# Allegro board main2.brd
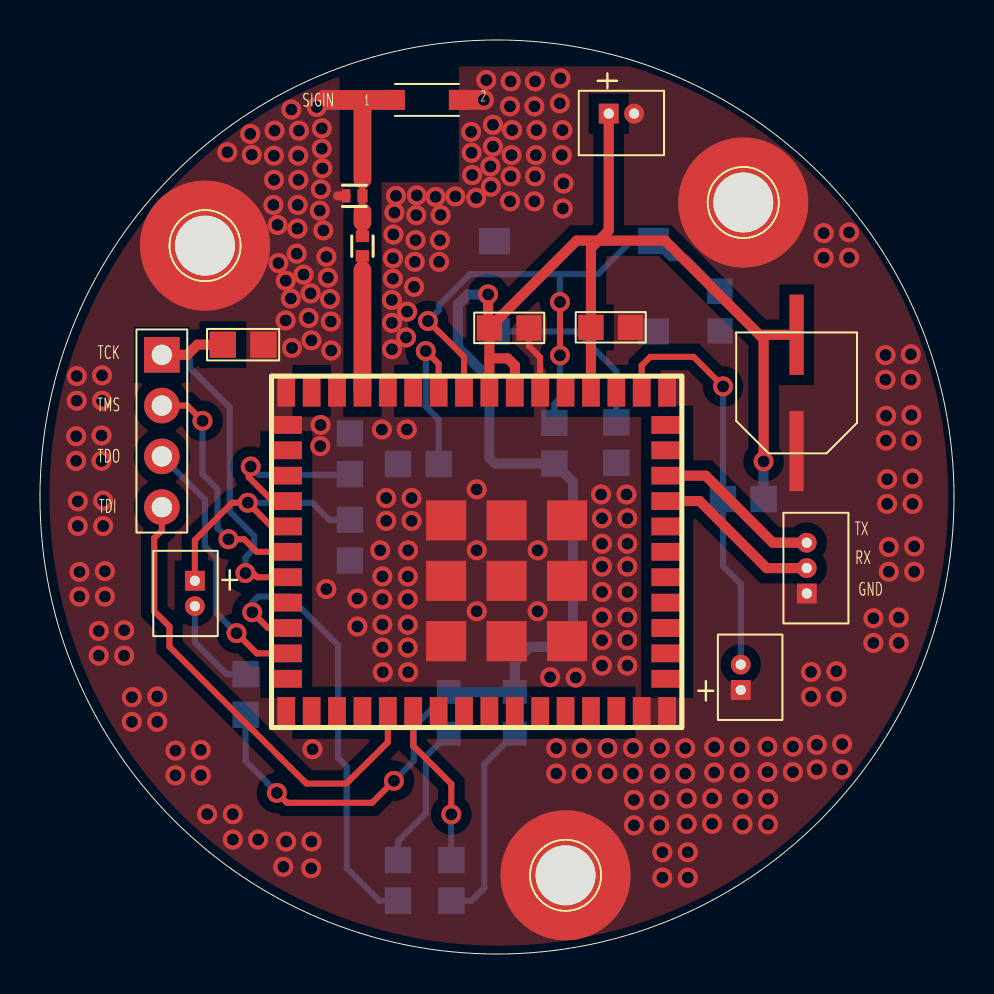
[diagram p0: board, top side]
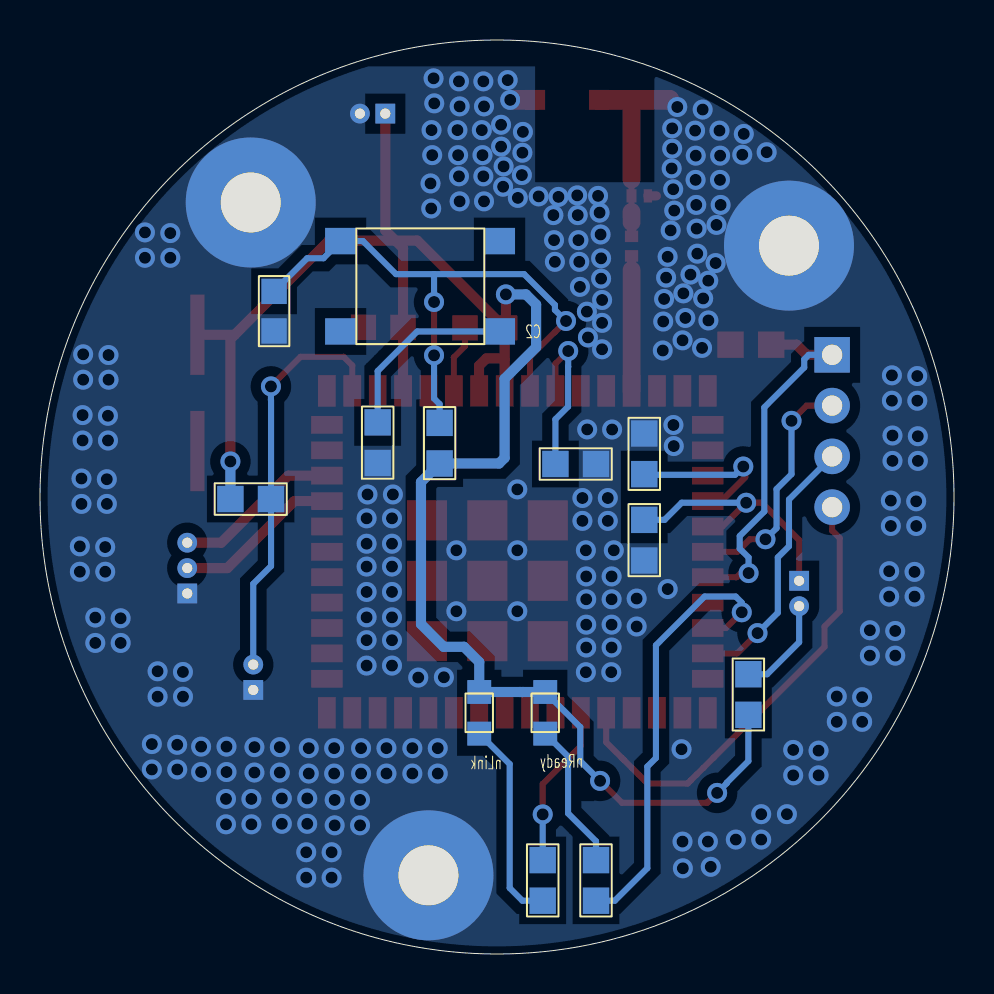
[diagram p1: board, bottom side, seen from below]

Outline 45.72 x 45.72 mm; copper layers: TOP, BOTTOM. Coordinates in mm from the lower left corner of the outline.
Outline path: circle c22.86,22.86 r22.86

## Placement (name value [footprint] x y rotation side)
C1  220uF/16V  [CAPPOL220U16V]  37.85 28.07 0 top
C2  22uF  [SMC0805]  23.47 31.32 0 top
C3  0.1uF  [SMC0805]  28.55 31.34 0 top
C4  1pF  [INDC_0402CS]  15.72 37.92 180 top
C5  0.1uF  [SMC0805]  34.01 32.16 270 bottom
D1  -  [LED]  23.75 12.06 270 bottom
D2  -  [LED]  20.45 12.06 270 bottom
J1  HEADER 2  [HEADER21P25MM]  35.05 13.84 180 top
J2  HEADER 3  [HEADER31P25MM]  38.35 19.3 180 top
J3  HEADER 4  [HEADER42P54MM]  6.1 26.16 0 top
J4  HEADER 2  [HEADER21P25MM]  7.75 18.03 0 top
J5  HEADER 2  [HEADER21P25MM]  29.08 42.04 90 top
J6  HEADER 1  [HOLD]  8.25 35.43 0 top
J7  HEADER 1  [HOLD]  26.29 3.94 0 top
J8  HEADER 1  [HOLD]  35.18 37.59 0 top
L1  3.6nH  [CC0402]  16.13 35.41 90 top
R1  75  [SMR0805]  20.57 3.68 270 bottom
R2  75  [SMR0805]  17.91 3.68 90 bottom
R3  4.7K  [SMR0805]  25.73 25.55 90 bottom
R4  100R  [SMR0805]  28.83 25.58 270 bottom
R5  4.7K  [SMR0805]  10.29 12.98 90 bottom
R6  4.7K  [SMR0805]  35.18 22.76 180 bottom
R7  100K  [SMR0805]  10.16 30.48 0 top
R8  2.7K  [SMR0805]  15.49 20.7 270 bottom
R9  100K  [SMR0805]  15.49 25.02 90 bottom
R10  100K  [SMR0805]  18.92 24.51 180 bottom
S1  SW PUSHBUTTON  [BUTTON]  26.7 33.4 180 bottom
U1  -  [CC3200MOD]  31.37 12.06 0 top
U2  2.45-GHz Ant  [ANT_AH316M]  19.35 42.72 0 top

## Library data of the parts
C1 = CAPACITOR POL
C2-C5 = CAP NP
D1 D2 = LED_0
J1 J4 J5 = HEADER 2
J2 = HEADER 3
J3 = HEADER 4
J6-J8 = HEADER 1
L1 = INDUCTOR
R1-R4 R7-R10 = RESISTOR_0
R5 R6 = R
S1 = SW PUSHBUTTON
U1 = CC3200MOD_0
U2 = 2_0.45-GHz Ant

## Footprints (pads in the part's own frame, mm; a bottom-side part is the same pattern mirrored in y, then rotated)
ANT_AH316M
  rect 1.001x1.001 smd: 1(-1.6,0) 2(1.6,0)
BUTTON
  rect 1.549x1.321 smd: (-3.988,-2.261) (3.962,2.261) 1(-3.988,2.261) 2(3.962,-2.261)
CAPPOL220U16V
  rect 0.711x4.013 smd: 1(0,2.908) 2(0,-2.908)
CC0402
  rect 0.579x0.66 smd: 1(-0.49,0) 2(0.49,0)
CC3200MOD
  rect 0.889x1.575 smd: 1(0,0) 2(-1.27,0) 3(-2.54,0) 4(-3.81,0) 5(-5.08,0) 6(-6.35,0) 7(-7.62,0) 8(-8.89,0) 9(-10.16,0) 10(-11.43,0) 11(-12.7,0) 12(-13.97,0) 13(-15.24,0) 14(-16.51,0) 15(-17.78,0) 16(-19.05,0) 28(-19.05,16.104) 29(-17.78,16.104) 30(-16.51,16.104) 31(-15.24,16.104) 32(-13.97,16.104) 33(-12.7,16.104) 34(-11.43,16.104) 35(-10.16,16.104) 36(-8.89,16.104) 37(-7.62,16.104) 38(-6.35,16.104) 39(-5.08,16.104) 40(-3.81,16.104) 41(-2.54,16.104) 42(-1.27,16.104) 43(0,16.104)
  rect 1.575x0.889 smd: 17(-19.05,1.702) 18(-19.05,2.972) 19(-19.05,4.242) 20(-19.05,5.512) 21(-19.05,6.782) 22(-19.05,8.052) 23(-19.05,9.322) 24(-19.05,10.592) 25(-19.05,11.862) 26(-19.05,13.132) 27(-19.05,14.402) 44(0,14.402) 45(0,13.132) 46(0,11.862) 47(0,10.592) 48(0,9.322) 49(0,8.052) 50(0,6.782) 51(0,5.512) 52(0,4.242) 53(0,2.972) 54(0,1.702)
  rect 2.007x2.007 smd: 55(-5.004,3.581) 56(-8.026,3.581) 57(-11.049,3.581) 58(-5.004,6.604) 59(-8.026,6.604) 60(-11.049,6.604) 61(-5.004,9.627) 62(-8.026,9.627) 63(-11.049,9.627)
HEADER21P25MM
  rect 0.991x0.991 hole 0.508: 1(0,0.635)
  round 0.991 hole 0.508: 2(0,-0.635)
HEADER31P25MM
  rect 0.991x0.991 hole 0.508: 1(0,1.27)
  round 0.991 hole 0.508: 2(0,0) 3(0,-1.27)
HEADER42P54MM
  rect 1.778x1.778 hole 1.016: 1(0,3.81)
  round 1.778 hole 1.016: 2(0,1.27) 3(0,-1.27) 4(0,-3.81)
HOLD
  round 6.502 hole 2.997: 1(0,0)
INDC_0402CS
  rect 0.508x0.66 smd: 1(-0.409,0)
  rect 0.419x0.66 smd: 2(0.409,0)
LED
  rect 1.194x1.194 smd: 1(-1.041,0) 2(1.041,0)
SMC0805
  rect 1.27x1.27 smd: 1(-0.991,0) 2(0.991,0)
SMR0805
  rect 1.321x1.321 smd: 1(-1.016,0) 2(1.016,0)

## Nets
GND: C1.2 C2.2 C3.2 C4.1 C4.2 C5.2 J1.1 J2.1 J5.2 J6.1 J7.1 J8.1 L1.2 R4.2 R7.2 R8.2 R9.2 R10.2 U1.1(GND2) U1.2(GND1) U1.16(GND18) U1.27(GND4) U1.28(GND7) U1.30(GND3) U1.32(GND8) U1.38(GND6) U1.43(GND5) U1.55(GND17) U1.56(GND16) U1.57(GND15) U1.58(GND14) U1.59(GND13) U1.60(GND12) U1.61(GND11) U1.62(GND10) U1.63(GND9) U2.1(IN) U2.2(GND)
VCC_3.3V: C1.1 C2.1 C3.1 D1.1 D2.1 J5.1 R3.1 R5.1 R6.1 U1.36(VBAT_DCDC_ANA) U1.37(VBAT_DCDC_PA) U1.40(VBAT_DCDC_DIG_IO)
NLINK: R1.1 U1.11(GPIO22)
NREADY: R2.1 U1.19(GPIO28)
NRESET: C5.1 R3.2 S1.1 U1.35(NRESET)
SOP2: J4.1 R8.1 U1.23(TCXO_EN/SOP2)
SWITCH: J1.2 R6.2 U1.42(GPIO30)
UART0_RX: J2.2 U1.47(GPIO2)
UART0_TX: J2.3 U1.46(GPIO1)
N01152: R4.1 S1.2
N10829: J3.1 R7.1 U1.21(JTAG_TCK)
N10833: J3.2 U1.22(JTAG_TMS)
N10837: J3.3 U1.18(JTAG_TDO)
N10841: J3.4 U1.12(JTAG_TDI)
N12921: L1.1 U1.31(RF_BG)
N18108: R10.1 U1.34(SOP0)
N18112: R9.1 U1.24(SOP1)
N33058: J4.2 R5.2
N545706: D1.2 R1.2
N545710: D2.2 R2.2

Pads without a net: U1 3 4 5 6 7 8 9 10 13 14 15 17 20 25 26 29 33 39 41 44 45 48 49 50 51 52 53 54

## Via types
v1: diameter 1.001, hole 0.599, TOP to BOTTOM, 252 vias

## Routing (per net, layer and track width the routed paths; a pad name or vN(x,y) marks a point on that pad's centre or on a via; arc(x,y) is an arc through that point)
GND: length 15.6
  TOP w0.305: U1.38 25.02,29.84 24.46,30.4 C2.2 ; 30.04,12.06 U1.2 ; 17.35,28.12 U1.32 ; 16.13,38.73 C4.1 16.13,37.12 ; 14.81,28.22 14.86,28.17
  TOP w0.457: 16.13,36.6 L1.2 ; C4.2 14.89,37.92
  TOP w0.889: 16.13,37.12 16.13,36.6 ; 16.13,38.73 16.13,42.72 16.12,42.72
  TOP w0.991: U2.2 v1(22.2,42.72) ; U2.1 14.24,42.72 14.24,42.73
  vias: v1(1.81,24.67) v1(1.84,28.91) v1(1.84,27.68) v1(1.81,25.9) v1(1.89,22.64) v1(1.89,21.41) v1(1.98,19.11) v1(1.97,17.88) v1(2.94,16.16) v1(2.94,14.93) v1(3.11,28.95) v1(3.11,27.68) v1(3.08,25.94) v1(3.08,24.67) v1(3.16,22.68) v1(3.16,21.41) v1(3.24,19.15) v1(3.24,17.88) v1(4.21,16.2) v1(4.21,14.93) v1(4.6,12.85) v1(4.59,11.61) v1(5.86,12.88) v1(5.86,11.61) v1(6.78,10.17) v1(6.77,8.94) v1(8.04,10.21) v1(8.04,8.94) v1(8.36,7) v1(9.37,40.11) v1(9.64,7) v1(9.64,5.73) v1(10.52,41.02) v1(10.59,39.98) v1(10.91,5.73) v1(11.7,39.93) v1(11.71,38.72) v1(11.67,37.47) v1(11.73,41.19) v1(11.88,36.47) v1(11.93,34.56) v1(12.17,4.36) v1(12.29,33.68) v1(12.29,31.69) v1(12.31,5.62) v1(12.57,42.24) v1(12.55,32.79) v1(12.6,30.32) v1(12.89,37.47) v1(12.88,36.28) v1(12.84,35.03) v1(12.95,41.19) v1(12.92,39.93) v1(12.93,38.72) v1(13.18,33.99) v1(13.44,31.82) v1(13.54,33.05) v1(13.58,30.7) v1(13.58,5.62) v1(13.56,4.29) v1(13.63,10.24) v1(13.84,42.37) v1(14,37.19) v1(14.1,41.3) v1(14.1,40.28) v1(14.05,38.25) v1(14.04,26.46) v1(14.02,25.41) v1(14.12,39.29) v1(14.17,36.2) v1(14.33,34.87) v1(14.4,33.83) v1(14.32,18.25) v1(14.5,32.77) v1(14.55,31.64) v1(14.57,30.19) v1(15.88,17.78) v1(15.88,16.38) v1(17.1,26.24) v1(17.02,20.19) v1(17.13,18.89) v1(17.13,17.74) v1(17.13,16.47) v1(17.13,15.33) v1(17.14,14.1) v1(17.32,22.81) v1(17.32,21.67) v1(17.6,32.72) v1(17.6,31.57) v1(17.6,30.25) v1(17.68,35.99) v1(17.65,34.8) v1(17.65,33.78) v1(17.81,37.92) v1(17.73,37.08) v1(18.36,32.13) v1(18.31,30.84) v1(18.35,26.24) v1(18.4,18.89) v1(18.4,17.74) v1(18.4,16.47) v1(18.4,15.33) v1(18.41,20.19) v1(18.41,14.1) v1(18.59,22.81) v1(18.59,21.67) v1(18.79,35.71) v1(18.75,34.62) v1(18.71,33.37) v1(18.85,37.95) v1(18.82,36.96) v1(19.79,37.87) v1(20.01,35.71) v1(19.96,34.62) v1(20.04,36.96) v1(20.78,37.9) v1(21.56,41.12) v1(21.59,40.08) v1(21.62,38.96) v1(21.82,37.82) v1(21.84,23.24) v1(21.84,20.19) v1(21.84,17.14) v1(22.33,43.71) v1(22.53,39.4) v1(22.56,38.38) v1(22.66,41.48) v1(22.66,40.39) v1(23.54,43.65) v1(23.51,42.4) v1(23.59,39.96) v1(23.54,38.9) v1(23.51,37.65) v1(23.62,41.21) v1(24.76,43.65) v1(24.73,42.4) v1(24.81,39.96) v1(24.76,38.9) v1(24.73,37.65) v1(24.84,41.21) v1(24.89,20.19) v1(24.89,17.14) v1(25.52,13.84) v1(25.82,10.3) v1(25.82,9.03) v1(26,42.55) v1(26.03,43.8) v1(26.1,39.96) v1(26.13,41.21) v1(26.18,38.54) v1(26.15,37.29) v1(26.8,13.83) v1(27.09,10.3) v1(27.09,9.03) v1(28.07,22.99) v1(28.11,21.79) v1(28.11,20.52) v1(28.11,19.38) v1(28.11,18.11) v1(28.11,16.84) v1(28.11,15.7) v1(28.11,14.43) v1(28.39,10.3) v1(28.39,9.03) v1(29.34,22.99) v1(29.38,21.79) v1(29.38,20.52) v1(29.38,19.38) v1(29.38,18.11) v1(29.38,16.84) v1(29.38,15.7) v1(29.38,14.43) v1(29.66,10.3) v1(29.66,9.03) v1(29.71,7.71) v1(29.71,6.44) v1(31.01,10.3) v1(31.01,9.03) v1(30.98,7.71) v1(30.98,6.44) v1(31.13,5.09) v1(31.13,3.82) v1(32.28,10.3) v1(32.28,9.03) v1(32.35,7.78) v1(32.35,6.51) v1(32.4,5.09) v1(32.4,3.82) v1(33.62,7.78) v1(33.62,6.51) v1(33.72,10.35) v1(33.72,9.08) v1(34.99,10.35) v1(34.99,9.08) v1(35.15,7.76) v1(35.15,6.49) v1(36.39,10.37) v1(36.39,9.1) v1(36.42,7.76) v1(36.42,6.49) v1(37.66,10.37) v1(37.66,9.1) v1(38.57,14.11) v1(38.57,12.87) v1(38.86,10.46) v1(38.85,9.23) v1(39.2,36.06) v1(39.2,34.83) v1(39.84,14.14) v1(39.84,12.87) v1(40.12,10.5) v1(40.12,9.23) v1(40.47,36.1) v1(40.47,34.83) v1(41.69,16.79) v1(41.68,15.56) v1(42.29,29.96) v1(42.29,28.73) v1(42.32,26.92) v1(42.32,25.69) v1(42.38,23.75) v1(42.37,22.51) v1(42.46,20.36) v1(42.46,19.12) v1(42.95,16.83) v1(42.95,15.56) v1(43.56,30) v1(43.56,28.73) v1(43.59,26.96) v1(43.59,25.69) v1(43.64,23.78) v1(43.64,22.51) v1(43.73,20.39) v1(43.73,19.12)
VCC_3.3V: length 96.2
  TOP w0.305: v1(17.7,8.66) 16.61,7.56 12.37,7.56 12.36,7.58 12.33,7.58 v1(11.85,8.06)
  TOP w0.508: 27.94,35.69 26.85,35.69 C2.1 ; 27.94,35.69 27.56,35.31 C3.1 U1.40 ; 27.94,35.69 28.45,36.2 J5.1 ; 27.94,35.69 31.27,35.69 35.98,30.98 ; 23.75,28.17 23.76,28.18 23.76,29.43 23.39,29.79 22.52,29.79 22.48,29.75 ; C2.1 22.48,29.75 ; C2.1 22.42,31.38 v1(22.42,32.99) ; 35.98,30.98 C1.1 ; 35.98,30.98 36.2,30.76 v1(36.2,24.64) ; 22.48,29.75 22.48,28.17
  BOTTOM w0.305: v1(11.85,8.06) 11.37,8.54 11.37,8.57 10.29,9.65 R5.1 ; D2.1 18.69,11.35 18.69,9.65 v1(17.7,8.66)
  BOTTOM w0.508: R6.1 v1(36.2,24.64) ; D2.1 21.57,13.11 21.59,13.1 21.71,13.11 D1.1 23.75,14.6 24.51,15.37 25.53,15.37 26.66,16.5 26.66,23.6 R3.1 22.76,24.54 22.48,24.82 22.48,28.78 20.9,30.35 20.9,32.49 21.41,32.99 v1(22.42,32.99)
NLINK: length 8.2
  TOP w0.305: 18.67,12.06 18.67,10.41 20.57,8.51 v1(20.57,6.98)
  BOTTOM w0.305: R1.1 v1(20.57,6.98)
NREADY: length 22.5
  TOP w0.305: U1.19 11.4,16.31 v1(10.62,17.09)
  BOTTOM w0.305: v1(10.62,17.09) 10.62,17.58 10.92,17.88 12.47,17.88 14.91,15.44 14.91,9.8 15.34,9.37 15.34,4.29 16.97,2.67 R2.1
NRESET: length 29.2
  TOP w0.305: 21.21,28.17 21.21,29.87 19.97,31.11 19.96,31.11 v1(19.41,31.66) ; v1(26.01,32.61) v1(26.01,29.95)
  BOTTOM w0.305: 26.01,34.01 21.51,34.01 19.96,32.46 19.96,32.22 v1(19.41,31.66) ; 26.01,34.01 v1(26.01,32.61) ; 26.01,34.01 27.91,34.01 29.57,35.66 S1.1 31.54,34.8 32.35,34.8 C5.1 ; v1(26.01,29.95) 26.01,27.79 25.73,27.51 R3.2
SOP2: length 13.3
  TOP w0.305: J4.1 7.75,20.71 9.61,22.57 v1(10.4,22.57) 11.58,21.39 U1.23
  BOTTOM w0.305: v1(10.4,22.57) 13.62,22.57 14.48,21.72 R8.1
SWITCH: length 20.4
  TOP w0.305: v1(34.17,28.39) 32.69,29.87 30.53,29.87 30.1,29.44 U1.42
  BOTTOM w0.305: v1(34.17,28.39) 34.17,27.72 34.16,27.71 R6.2 34.16,19.41 35.05,18.52 J1.2
UART0_RX: length 8.4
  TOP w0.508: J2.2 36.35,19.3 32.99,22.66 U1.47
UART0_TX: length 8.4
  TOP w0.508: J2.3 36.65,20.57 33.3,23.93 U1.46
N01152: length 9.5
  BOTTOM w0.305: S1.2 26.85,31.14 28.83,29.16 R4.1
N10829: length 19.1
  TOP w0.305: v1(10.28,19.06) 10.66,19.06 10.87,18.85 U1.21
  TOP w0.508: R7.1 7.87,30.48 7.37,29.97 J3.1
  BOTTOM w0.305: v1(10.28,19.06) 10.28,19.84 10.72,20.28 10.72,20.91 9.49,22.14 9.49,27.34 7.49,29.34 7.49,29.74 7.26,29.97 J3.1
N10833: length 12
  TOP w0.305: U1.22 10.84,20.12 10.21,20.75 v1(9.43,20.75) ; v1(8.13,26.67) 7.37,27.43 J3.2
  BOTTOM w0.305: v1(8.13,26.67) 8.13,24 8.88,23.25 8.88,21.3 v1(9.43,20.75)
N10837: length 13.3
  TOP w0.305: v1(9.83,16.05) 10.85,15.04 U1.18
  BOTTOM w0.305: v1(9.83,16.05) 8.81,17.07 8.81,19.84 8.25,20.4 8.25,22.73 J3.3
N10841: length 23.5
  TOP w0.305: J3.4 6.1,21.18 5.71,20.8 5.71,17.14 6.48,16.38 6.48,15.37 12.02,9.82 12.02,9.82 12.54,9.31 12.54,9.31 12.88,8.97 12.88,8.97 13.17,8.68 13.17,8.68 13.29,8.56 13.3,8.56 13.33,8.53 15.32,8.53 15.35,8.56 15.36,8.56 15.48,8.68 15.48,8.68 15.77,8.98 15.78,8.98 16.11,9.31 16.11,9.31 16.5,9.7 16.5,9.7 16.63,9.82 16.63,9.82 17.4,10.59 U1.12
N12921: length 6.7
  TOP w0.457: L1.1 16.13,34.21
  TOP w0.889: U1.31 16.13,34.21
N18108: length 8.2
  TOP w0.305: U1.34 19.94,29.52 v1(19.3,30.16)
  BOTTOM w0.305: 19.94,24.51 19.94,26.75 19.3,27.38 19.3,29.38 19.3,29.38 v1(19.3,30.16)
N18112: length 8.1
  TOP w0.305: v1(10.54,24.38) 10.44,24.28 10.44,23.85 11.63,22.66 U1.24
  BOTTOM w0.305: R9.1 15.46,23.97 10.96,23.97 v1(10.54,24.38)
N33058: length 5
  BOTTOM w0.305: J4.2 7.75,15.6 9.35,14 R5.2
N545706: length 10.3
  BOTTOM w0.305: R1.2 21.59,2.67 22.22,3.3 22.22,9.5 23.75,11.02
N545710: length 7.4
  BOTTOM w0.305: R2.2 17.91,5.64 19.3,7.04 19.3,9.88 D2.2

## Copper pours and planes (outline as drawn; the poured copper is in the pictures)
GND on TOP: 29.49,44.4 23.71,0.43 14.99,43.91 14.99,38.61 15.18,38.61 15.18,34.08 17.09,34.08 17.09,38.61 20.95,38.61 20.95,43.97 20.95,43.97 20.95,44.4 ; 1 cut-out
GND on BOTTOM: 29.29,44.4 23.62,0.39 14.99,43.91 14.99,38.61 20.95,38.61 20.95,44.4 ; 7 cut-outs

## Text on the board
Ref Des/Silkscreen Bottom: nReady | C2 | nLink
Ref Des/Assembly Top: R*
Ref Des/Silkscreen Top: TMS | TCK | TDO | TDI | SIGIN | TX | RX | GND
